# EAGLE board 555 (EAGLE 9.6.2)
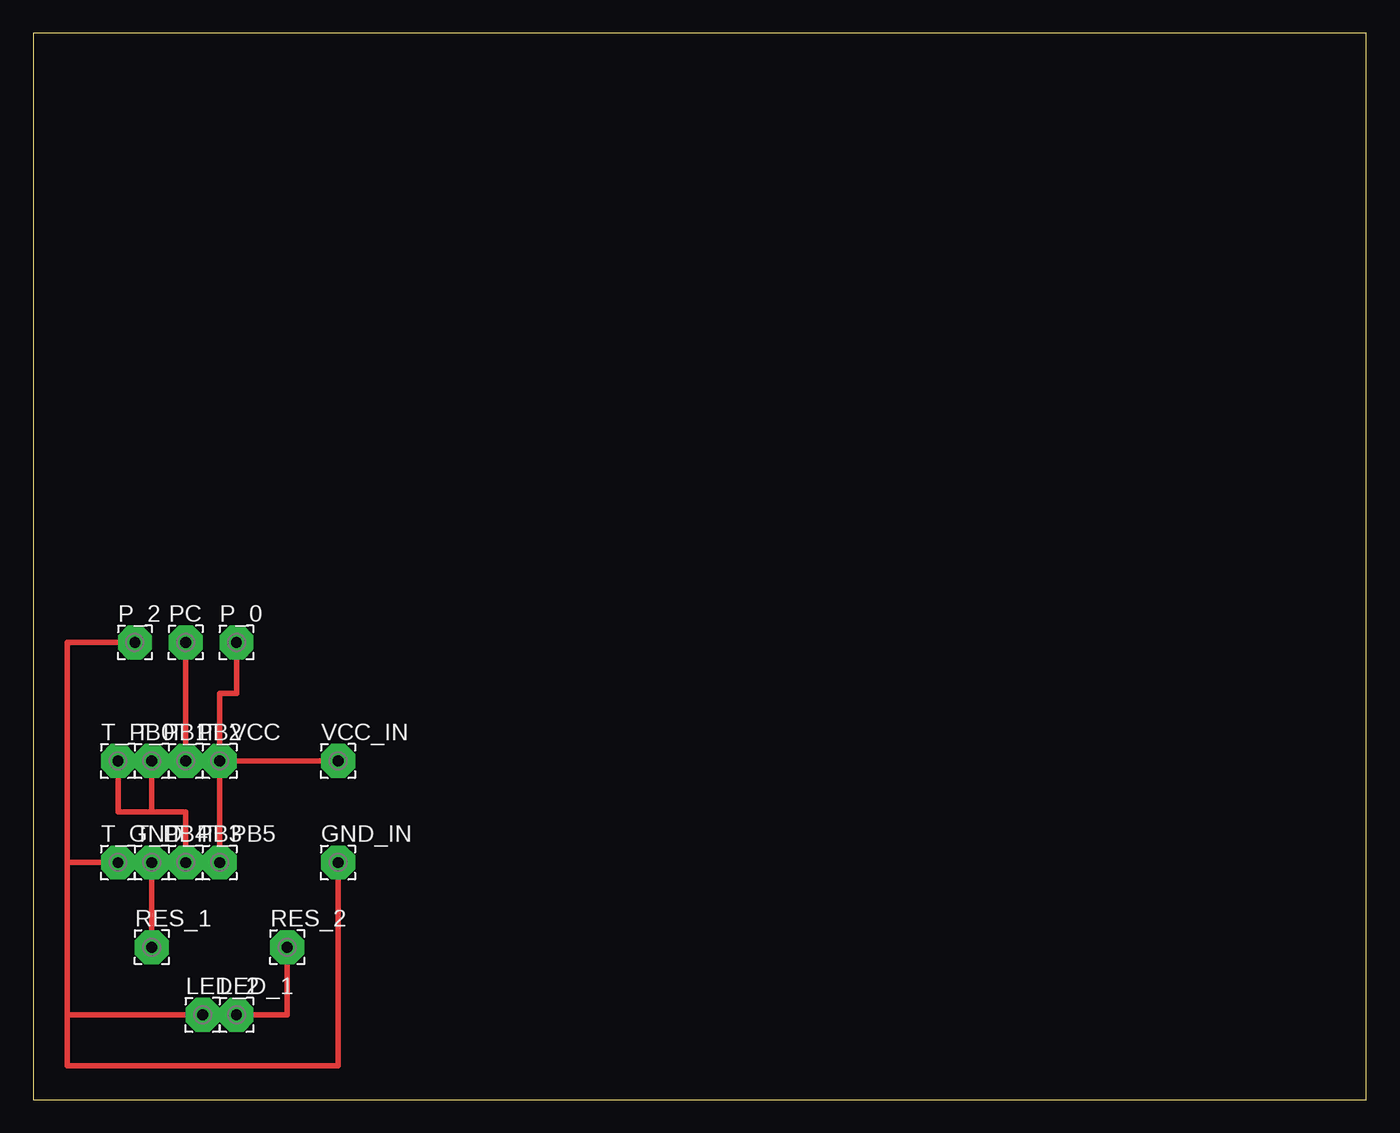
[diagram p0: board, top side]

Size 100 x 80 mm. Coordinates in mm from the lower left corner, seen from the top.
Outline: 0,0 100,0 100,80 0,80 0,0
Copper layers (1*16): Top 0.035mm / dielectric 1.5mm / Bottom 0.035mm
Design rules "default": minimum track width 6mil, minimum drill 0.35mm, track to track 6mil, track to pad 6mil, pad to pad 6mil, via to via 6mil, smd to smd 6mil, copper to edge 40mil, drill to drill 6mil, minimum pad ring 10mil, minimum via ring 8mil, stop-mask expansion 4mil, vias tented up to drill 0mil, thermal gap 10mil

## Footprints (pad centres in the part's own frame; a part is rotated, then mirrored left to right if it is on the bottom)
2,54/0,8 = drill 0.813 pad 2.54 octagon: 1 0,0

## Placement (x,y rotation side)
GND_IN  [2,54/0,8]  22.86,17.78 0 top
LED_1  [2,54/0,8]  15.24,6.35 0 top
LED_2  [2,54/0,8]  12.7,6.35 0 top
P_0  [2,54/0,8]  15.24,34.29 0 top
P_2  [2,54/0,8]  7.62,34.29 0 top
PC  [2,54/0,8]  11.43,34.29 0 top
RES_1  [2,54/0,8]  8.89,11.43 0 top
RES_2  [2,54/0,8]  19.05,11.43 0 top
T_GND  [2,54/0,8]  6.35,17.78 0 top
T_PB0  [2,54/0,8]  6.35,25.4 0 top
T_PB1  [2,54/0,8]  8.89,25.4 0 top
T_PB2  [2,54/0,8]  11.43,25.4 0 top
T_PB3  [2,54/0,8]  11.43,17.78 0 top
T_PB4  [2,54/0,8]  8.89,17.78 0 top
T_PB5  [2,54/0,8]  13.97,17.78 0 top
T_VCC  [2,54/0,8]  13.97,25.4 0 top
VCC_IN  [2,54/0,8]  22.86,25.4 0 top

## Library data of the parts
GND_IN LED_1 LED_2 P_0 P_2 PC RES_1 RES_2 T_GND T_PB0 T_PB1-T_PB5 T_VCC VCC_IN = wirepad

## Nets
N$1: P_0.1 T_PB5.1 T_VCC.1 VCC_IN.1
N$2: GND_IN.1 LED_2.1 P_2.1 T_GND.1
N$3: RES_1.1 T_PB4.1
N$4: LED_1.1 RES_2.1
N$5: T_PB0.1 T_PB1.1 T_PB3.1
N$6: PC.1 T_PB2.1

## Tracks (layer width: path | path; a pad name or v marks a point on that pad's centre or on a via)
N$1
  Top 0.406: VCC_IN.1 T_VCC.1 | T_VCC.1 13.97,30.48 15.24,30.48 P_0.1 | T_PB5.1 T_VCC.1
N$2
  Top 0.406: P_2.1 2.54,34.29 2.54,17.78 | 2.54,17.78 T_GND.1 | 2.54,17.78 2.54,6.35 | 2.54,6.35 LED_2.1 | GND_IN.1 22.86,2.54 2.54,2.54 2.54,6.35
N$3
  Top 0.406: T_PB4.1 RES_1.1
N$4
  Top 0.406: LED_1.1 19.05,6.35 RES_2.1
N$5
  Top 0.406: T_PB1.1 8.89,21.59 | 8.89,21.59 11.43,21.59 T_PB3.1 | T_PB0.1 6.35,21.59 8.89,21.59
N$6
  Top 0.406: T_PB2.1 PC.1